# Altium PCB LPEDT_revA1_bikeit_rev_01.PcbDoc (part 1 of 3)
Units mil, origin at the board's own origin, x right, y up, seen from the top; angles counter-clockwise.
Board outline 6000 x 4000 mil, 2 copper layers (Top Layer, Bottom Layer); 80 components, 64 nets, 444 pads, 0 vias.
Unrouted connection lines stored in the file: 203.
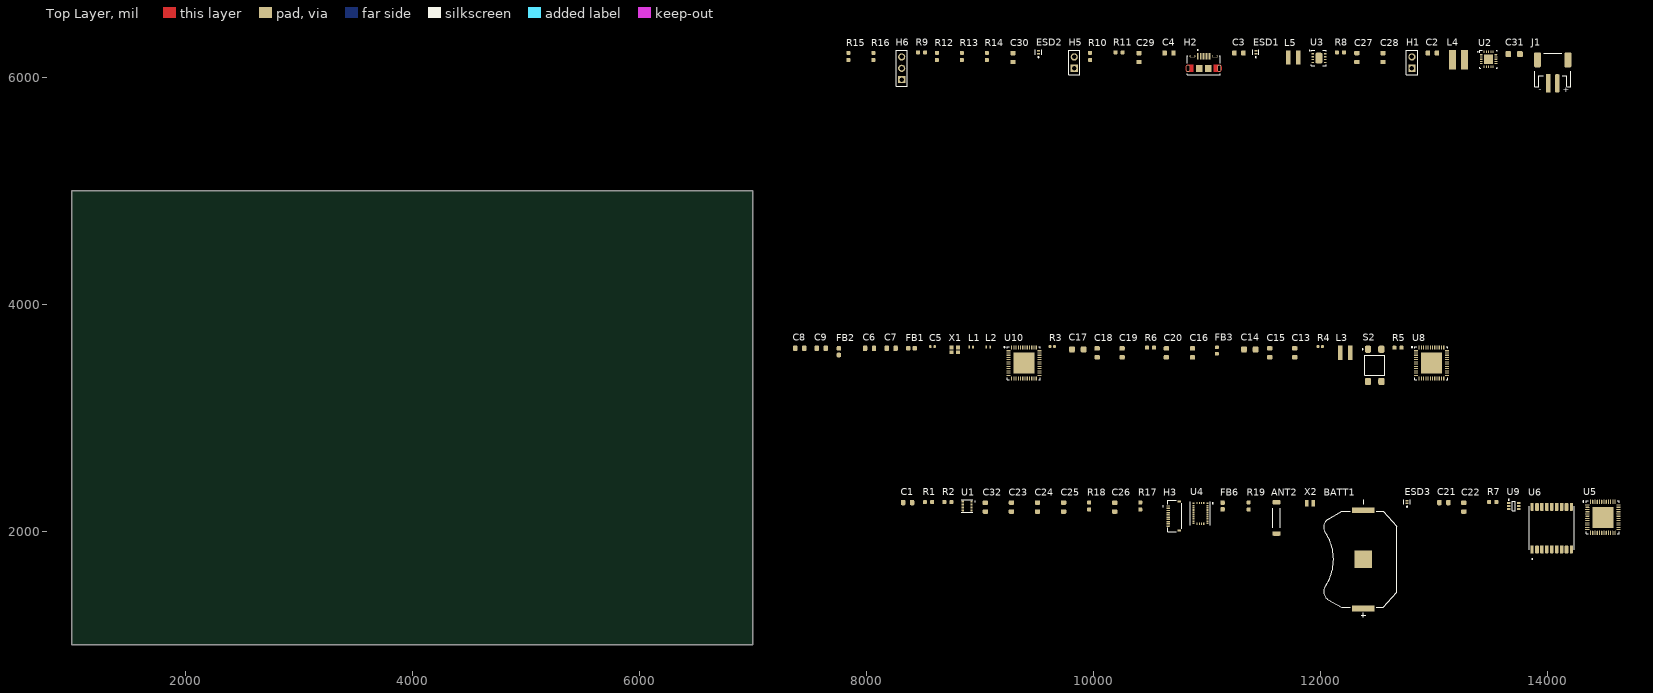
[diagram p0: Top Layer view]
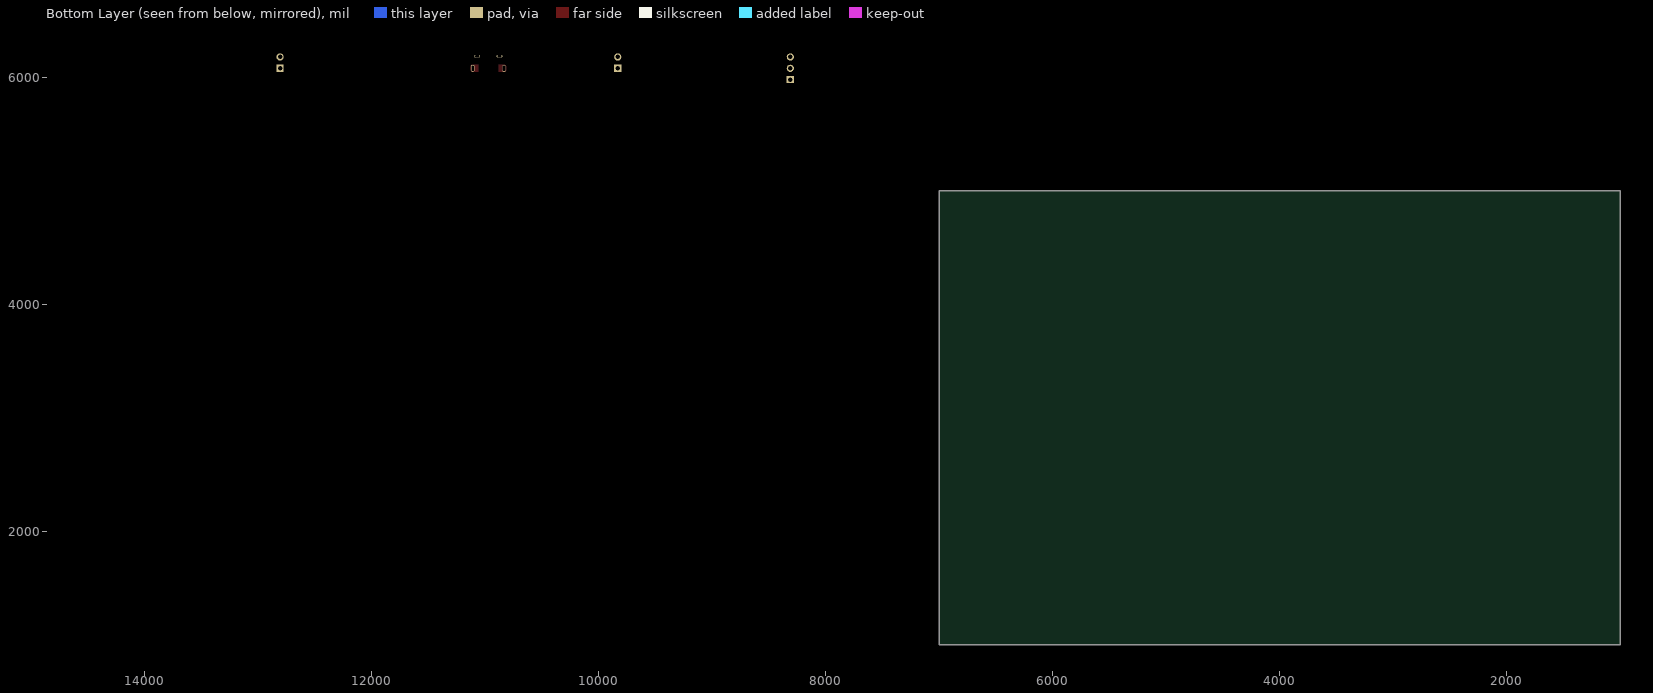
[diagram p1: Bottom Layer view, seen from below]

## Layer stack, top to bottom
Top Solder: solder mask 0.4, Solder Resist, Dk 3.5
Top Layer: signal copper 1.4
Dielectric 1: dielectric 12.6, FR-4, Dk 4.8
Bottom Layer: signal copper 1.4
Bottom Solder: solder mask 0.4, Solder Resist, Dk 3.5

## Board outline
1000,1000 7000,1000 7000,5000 1000,5000

## Design rules (kind name [scope] priority, off if disabled: settings)
Clearance [All] p1: gap=10 ignorepadtopadclearanceinfootprint=FALSE except(0: Arc-Hole Track-Hole SMDPad-Hole THPad-Hole Via-Hole Fill-Hole Poly-Hole Region-Hole Text-Hole)
PolygonConnect [All] p1: connectstyle=Relief reliefconductorwidth=10 reliefentries=4 polygonreliefangle="90 Angle" airgapwidth=10
RoomDefinition LPEDT_revA1_bikeit_POWER [InComponentClass('LPEDT_revA1_bikeit_POWER')] p1: confinementstyle=ConfineIn formatcopy=TRUE lockcomponents=FALSE outline 7808.31,5840 14253.31,5840 14253.31,6355 7808.31,6355
RoomDefinition LPEDT_revA1_bikeit_MCU_POWER_RESET [InComponentClass('LPEDT_revA1_bikeit_MCU_POWER_RESET')] p2: confinementstyle=ConfineIn formatcopy=TRUE lockcomponents=FALSE outline 7340,3273.54 13150,3273.54 13150,3753.54 7340,3753.54
RoomDefinition LPEDT_revA1_bikeit_MCU_IO [InComponentClass('LPEDT_revA1_bikeit_MCU_IO')] p3: confinementstyle=ConfineIn formatcopy=TRUE lockcomponents=FALSE outline 8290,1229.37 14660,1229.37 14660,2394.37 8290,2394.37
RoutingVias [All] p1: holewidth=28 width=50 viastyle="Through Hole" minholewidth=28 minwidth=50 maxholewidth=28 maxwidth=50
SolderMaskExpansion [All] p1: expansion=4 istentingtop=FALSE
Width [All] p1: maxlimit=10 minlimit=10 preferedwidth=10
30 further rules are at their usual default settings.

## Classes and differential pairs
component class LPEDT_revA1_bikeit_POWER: C2 C3 C4 C27 C28 C29 C30 C31 ESD1 ESD2 H1 H2 H5 H6 J1 L4 L5 R8 R9 R10 R11 R12 R13 R14 R15 R16 U2 U3
component class LPEDT_revA1_bikeit_MCU_POWER_RESET: ANT1 C5 C6 C7 C8 C9 C13 C14 C15 C16 C17 C18 C19 C20 FB1 FB2 FB3 L1 L2 L3 R3 R4 R5 R6 S2 U8 U10 X1
component class LPEDT_revA1_bikeit_MCU_IO: ANT2 BATT1 C1 C21 C22 C23 C24 C25 C26 C32 ESD3 FB6 H3 H4 R1 R2 R7 R17 R18 R19 U1 U4 U5 U6 U9 X2

## Components (designator, comment, footprint, x,y, rotation, side; value= is the part's Value field where it differs from the comment)
ANT2 "1.561GHZ/1.575GHZ CHIP" CHIP_ANTENNA 11615,2119.37 r90 top
BATT1 "2032 Coin Cell Holder" COINCELL-3034TR-MFG 12380,1754.37 r90 top
C1 "0.1uF 25V" CAP_0603_1.60mm*0.80mm 8365,2254.37 r0 top
C2 "4.7uF 25V" CAP_0603_1.60mm*0.80mm 12988.31,6215 r0 top
C3 "0.1uF 25V" CAP_0603_1.60mm*0.80mm 11283.31,6215 r0 top
C4 "0.1uF 25V" CAP_0603_1.60mm*0.80mm 10668.31,6215 r0 top
C5 "1.5pF 50V" CAP_0403_1.00mm*0.50mm 8585,3628.54 r0 top
C6 "100pF 100V" CAP_0603_1.60mm*0.80mm 8030,3613.54 r0 top
C7 "10pF 50V" CAP_0603_1.60mm*0.80mm 8220,3613.54 r0 top
C8 "0.22uF 25V" CAP_0603_1.60mm*0.80mm 7415,3613.54 r0 top
C9 "10pF 50V" CAP_0603_1.60mm*0.80mm 7605,3613.54 r0 top
C13 "4.7uF 25V" CAP_0603_1.60mm*0.80mm 11775,3573.54 r90 top
C14 "10uF 25V" CAP_0805_2MM 11380,3603.54 r0 top
C15 "1uF 50V" CAP_0603_1.60mm*0.80mm 11555,3573.54 r90 top
C16 "0.1uF 25V" CAP_0603_1.60mm*0.80mm 10875,3573.54 r90 top
C17 "10uF 25V" CAP_0805_2MM 9865,3603.54 r0 top
C18 "0.01uF 100V" CAP_0603_1.60mm*0.80mm 10035,3573.54 r90 top
C19 "1uF 50V" CAP_0603_1.60mm*0.80mm 10255,3573.54 r90 top
C20 "1uF 50V" CAP_0603_1.60mm*0.80mm 10645,3573.54 r90 top
C21 "1uF 50V" CAP_0603_1.60mm*0.80mm 13090,2254.37 r0 top
C22 "4.7uF 25V" CAP_0603_1.60mm*0.80mm 13265,2214.37 r90 top
C23 "0.1uF 25V" CAP_0603_1.60mm*0.80mm 9280,2214.37 r90 top
C24 "1uF 50V" CAP_0603_1.60mm*0.80mm 9510,2214.37 r90 top
C25 "1uF 50V" CAP_0603_1.60mm*0.80mm 9740,2214.37 r90 top
C26 "0.1uF 25V" CAP_0603_1.60mm*0.80mm 10190,2214.37 r90 top
C27 "0.01uF 100V" CAP_0603_1.60mm*0.80mm 12323.31,6175 r90 top
C28 "4.7uF 25V" CAP_0603_1.60mm*0.80mm 12553.31,6175 r90 top
C29 "22uF 10V" CAP_0603_1.60mm*0.80mm 10403.31,6175 r90 top
C30 "0.01uF 100V" CAP_0603_1.60mm*0.80mm 9293.31,6175 r90 top
C31 "100uF 6.3V" CAP_0805_2MM 13708.31,6205 r0 top
C32 "1uF 50V" CAP_0603_1.60mm*0.80mm 9050,2214.37 r90 top
ESD1 "ESD Diode" SP1003-01ETG-MFG 11433.31,6220 r90 top
ESD2 "ESD Diode" SP1003-01ETG-MFG 9518.31,6220 r90 top
ESD3 "ESD Diode" SP1003-01ETG-MFG 12765,2259.37 r90 top
FB1 "BLM18AG601SN1D 100 MHz" FB_Chip2PinSM127P600-8N 8400,3613.54 r0 top
FB2 "BLM18AG601SN1D 100 MHz" FB_Chip2PinSM127P600-8N 7760,3583.54 r90 top
FB3 "74279266 1 KOhm" FB_0603_1.60mm*0.80mm 11090,3593.54 r90 top
FB6 "BLM18AG601SN1D 100MHz" FB_Chip2PinSM127P600-8N 11140,2224.37 r90 top
H1 "Terminal Block - 2 Pin" 2-PIN_MALE_HEADER_01-IN 12808.31,6130 r90 top
H2 "USB MICRO B RECPT" MICROUSB_AMPHENOL_10118194-0001LF 10973.31,6080 r0 top
H3 "CONN FFC FPC 10POS 0.50MM" FPC_AYF531035A 10660,2224.37 r90 top
H5 "0.1\" M Header" 2-PIN_MALE_HEADER_01-IN 9833.31,6130 r90 top
H6 "0.1\" M Header" 3-PIN_MALE_HEADER_01-IN 8313.31,6080 r90 top
J1 "S2B-PH-SM4-TB" JST_S2B-PH-SM4-TB 14048.31,6095 r0 top
L1 "1.9nH 1A" IND_0402 8925,3623.54 r0 top
L2 "1.9nH 1A" IND_0402 9075,3623.54 r0 top
L3 "4.7uH 1.35A" "IND_WE-TPC 2828" 12220,3573.54 r0 top
L4 "22uH 510mA" IND_WE-TPC-3816-S 13218.31,6155 r0 top
L5 "10uH 650mA" IND_WE-TPC-2813-TH 11763.31,6175 r0 top
R1 "4.7k 1%" RES_0603_1608X06 8550,2259.37 r0 top
R2 "4.7k 1%" RES_0603_1608X06 8720,2259.37 r0 top
R3 "0 Ohm 1/16W" RES_C1005X04N 9640,3628.54 r0 top
R4 "0 Ohm 1/16W" RES_C1005X04N 12000,3628.54 r0 top
R5 "100 1%" RES_0603_1608X06 12685,3618.54 r0 top
R6 "1 Ohm 1% 0.1W" RES_0603_1608X06 10505,3618.54 r0 top
R7 "100k 1%" RES_0603_1608X06 13520,2259.37 r0 top
R8 "10k 1%" RES_0603_1608X06 12178.31,6220 r0 top
R9 "698 0.1W 1%" RES_0603_1608X06 8488.31,6220 r0 top
R10 "4.75M 1%" RES_0603_1608X06 9973.31,6185 r90 top
R11 "8.25M 0.1W 1%" RES_0603_1608X06 10228.31,6220 r0 top
R12 "4.22M 0.1W 1%" RES_0603_1608X06 8623.31,6185 r90 top
R13 "8.06M 1%" RES_0603_1608X06 8843.31,6185 r90 top
R14 "715k 1%" RES_0603_1608X06 9063.31,6185 r90 top
R15 "7.5M 0.1W 1%" RES_0603_1608X06 7843.31,6185 r90 top
R16 "5.62M 0.1W 1%" RES_0603_1608X06 8063.31,6185 r90 top
R17 "10k 1%" RES_0603_1608X06 10415,2224.37 r90 top
R18 "10k 1%" RES_0603_1608X06 9965,2224.37 r90 top
R19 "10k 1%" RES_0603_1608X06 11370,2224.37 r90 top
S2 "SWITCH SPST-NO 50MA 12V" SW_TL3305AF260QG 12480,3463.54 r0 top
U1 "BME280" BME280_PSON65P250X250X100-8N 8890,2224.37 r0 top
U2 "BQ25570RGRR PMIC" PMIC_RGR0020A_NV 13483.31,6160 r0 top value=Value
U3 "TPS2115ADRBT Power Mux" PMUX_SON127P600-8N 11988.31,6170 r0 top
U4 "BNO055" BNO055-MFG 10945,2159.37 r0 top
U5 "EFR32BG13P732F512GM48-C" MCU_QFN50P700X700X90_HS-49N 14490,2124.37 r0 top
U6 "MAX-M8Q-0" XCVR_MAX-M8C-0-10 14040,2029.37 r90 top
U8 "EFR32BG13P732F512GM48-C" MCU_QFN50P700X700X90_HS-49N 12980,3483.54 r0 top
U9 "TPS22919DCKR Power Switch/Driver" LS_SOT65P210X110-6N 13705,2224.37 r0 top
U10 "EFR32BG13P732F512GM48-C" MCU_QFN50P700X700X90_HS-49N 9390,3483.54 r0 top
X1 "38.4 MHz Crystal" "SMD_4 CRYSTAL" 8780,3598.54 r0 top
X2 "32.768kHz Crystal" "SMD_2 Crystal" 11910,2249.37 r0 top

## Footprints (in the part's own frame and the unit in brackets; to place one, negate y for a bottom-side part, rotate by r counter-clockwise, add the part's x,y. Pads: shape width x height; smd on the part's side, far side on the other; paste and mask are expansions set on the pad)
2-PIN_MALE_HEADER_01-IN [mm] "Terminal Assembly, 1x2 Pins, Vertical, 2.54mm Pitch, Male"
  rect 1.6x1.6 hole 1.02: 1(-1.27,0)
  round 1.6 hole 1.02: 2(1.27,0)
  silkscreen extent -2.73,-1.24 2.73,1.24, body extent -2.54,-1.22 2.54,1.27, height 8.54
3-PIN_MALE_HEADER_01-IN [mm] ".025 SQ Post Terminal Strip Assembly, 1x3 Pins, Vertical, 2.54mm Pitch, Male"
  rect 1.6x1.6 hole 1.02: 1(-2.54,0)
  round 1.6 hole 1.02: 2(0,0) 3(2.54,0)
  silkscreen extent -4,-1.27 4,1.27, body extent -3.81,-1.27 3.81,1.22, height 8.54
BME280_PSON65P250X250X100-8N [mm]
  rect 0.49x0.45 smd paste+0 mask+0.085: 1(0.97,0.975)
  rrect25% 0.49x0.45 smd paste+0 mask+0.085: 2(0.97,0.325) 3(0.97,-0.325) 4(0.97,-0.975) 5(-0.97,-0.975) 6(-0.97,-0.325) 7(-0.97,0.325) 8(-0.97,0.975)
  silkscreen extent -1.3,-1.39 1.83,1.39, body extent -1.25,-1.25 1.25,1.25, height 1
BNO055-MFG [mm]
  rect 0.475x0.35 smd paste+0 mask-1000: 1(1.563,2.25) 6(-1.562,2.25) 7(-1.562,1.75) 8(-1.562,1.25) 9(-1.562,0.75) 10(-1.562,0.25) 11(-1.562,-0.25) 12(-1.562,-0.75) 13(-1.562,-1.25) 14(-1.562,-1.75) 15(-1.562,-2.25) 20(1.563,-2.25) 21(1.563,-1.75) 22(1.563,-1.25) 23(1.563,-0.75) 24(1.563,-0.25) 25(1.563,0.25) 26(1.563,0.75) 27(1.563,1.25) 28(1.563,1.75)
  rect 0.25x0.475 smd paste+0 mask-1000: 2(0.75,2.313) 3(0.25,2.313) 4(-0.25,2.313) 5(-0.75,2.313) 16(-0.75,-2.312) 17(-0.25,-2.312) 18(0.25,-2.312) 19(0.75,-2.312)
  silkscreen extent -2.25,-2.65 2.88,2.65, body extent -2.45,-3.15 2.45,3.15, height 0.25
CAP_0403_1.00mm*0.50mm [mm] "Chip Capacitor, 2-Leads, Body 1.00x0.50mm, IPC Medium Density"
  rrect50% 0.55x0.6 smd: 1(-0.475,0) 2(0.475,0)
  body extent -0.53,-0.28 0.53,0.28, height 0.55
CAP_0603_1.60mm*0.80mm [mm] "Chip Capacitor, 2-Leads, Body 1.60x0.80mm, IPC Medium Density"
  rrect50% 1x1.2 smd: 1(-1,0) 2(1,0)
  body extent -0.87,-0.48 0.88,0.47, height 0.95
CAP_0805_2MM [mm] "Chip Capacitor, 2-Leads, Body 2.00x1.25mm, IPC Medium Density"
  rrect50% 1.3x1.4 smd: 1(-1.3,0) 2(1.3,0)
  body extent -1.07,-0.7 1.08,0.7, height 1.4
CHIP_ANTENNA [mm] "Chip Capacitor, 2-Leads, Body 7.00x2.00mm, IPC Medium Density"
  rrect50% 1x1.8 smd: 1(-3.5,0) 2(3.5,0)
  silkscreen extent -2.2,-0.8 2.2,0.8, body extent -3.6,-1.1 3.6,1.1, height 1
COINCELL-3034TR-MFG [mil]
  rect 156x156 smd paste-39370.1 mask+0: 1(0,0)
  rect 50x200 smd paste+0 mask+0: 2(-432.48,0) 2(432.48,0)
  silkscreen extent -512,-296 526,349, body extent -461,-300 461,353, height 10
FB_0603_1.60mm*0.80mm [mm] "Ferrite Bead, 2-Leads, Body 1.60x0.80mm, IPC Medium Density"
  rrect50% 0.8x0.85 smd: 1(-0.725,0) 2(0.725,0)
  body extent -0.8,-0.4 0.8,0.4, height 0.8
FB_Chip2PinSM127P600-8N [mm]
  rrect50% 1.02x0.98 smd: 1(-0.74,0) 2(0.74,0)
  body extent -0.87,-0.48 0.88,0.47, height 0.95
FPC_AYF531035A [mm]
  rect 0.3x0.8 smd mask+0.082: 1(0,0)
  rrect50% 0.3x0.8 smd mask+0.082: 2(-0.5,0) 3(-1,0) 4(-1.5,0) 5(-2,0) 6(-2.5,0) 7(-3,0) 8(-3.5,0) 9(-4,0) 10(-4.5,0)
  rrect50% 0.4x0.8 smd mask+0.082: S1(1,-2.5) S2(-5.5,-2.5)
  silkscreen extent -5.75,-3.1 1.25,1.22, body extent -5.75,-2.97 1.25,0.73, height 1
IND_0402 [mm] "Chip Inductor, 2-Leads, Body 1.00x0.60mm, IPC Medium Density"
  rrect50% 0.35x0.65 smd: 1(-0.425,0) 2(0.425,0)
  body extent -0.52,-0.33 0.53,0.33, height 0.6
"IND_WE-TPC 2828" [mm] "SMD Inductor, 2-Leads, Body 2,8x2,8mm"
  rect 1x3.2 smd: 1(-1.1,0) 2(1.1,0)
  body extent -1.4,-1.4 1.4,1.4, height 2.79
IND_WE-TPC-2813-TH [mm] "SMD Inductor, 2-Leads, Body 2.8 x 2.8 mm"
  rect 1x3.2 smd: 1(-1.1,0) 2(1.1,0)
  body extent -1.38,-1.39 1.4,1.39, height 1.15
IND_WE-TPC-3816-S [mm] "SMD Inductor, 2-Leads, Body 3.8 x 3.8 mm"
  rect 1.6x4.3 smd: 1(-1.35,0) 2(1.35,0)
  body extent -1.9,-1.9 1.9,1.9, height 1.64
JST_S2B-PH-SM4-TB [mil]
  rect 40x160 smd: 1(-39.44,-147.2)
  rrect50% 40x160 smd: 2(39.93,-147.2)
  rrect50% 63x134 smd: NC1(-133.93,58.46) NC2(133.93,58.46)
  silkscreen extent -158,-179 158,117, body extent -156,-216 155,123, height 220
LS_SOT65P210X110-6N [mm] "SOT23, 6-Leads, Body 2.00x2.10mm, Pitch 0.65mm, IPC Medium Density"
  rrect50% 0.85x0.4 smd: 1(-1.125,0.65) 2(-1.125,0) 3(-1.125,-0.65) 4(1.125,-0.65) 5(1.125,0) 6(1.125,0.65)
  silkscreen extent -1.25,-1.1 0.3,1.52, body extent -1.2,-1.07 1.2,1.07, height 1.1
MCU_QFN50P700X700X90_HS-49N [mm] "QFN, 48-Leads, Body 7.00x7.00mm, Pitch 0.50mm, Thermal Pad 4.70x4.70mm, IPC Medium Density"
  rect 4.7x4.7 smd: 0(0,0)
  rect 0.95x0.25 smd: 1(-3.475,2.75)
  oval 0.95x0.25 smd: 2(-3.475,2.25) 3(-3.475,1.75) 4(-3.475,1.25) 5(-3.475,0.75) 6(-3.475,0.25) 7(-3.475,-0.25) 8(-3.475,-0.75) 9(-3.475,-1.25) 10(-3.475,-1.75) 11(-3.475,-2.25) 12(-3.475,-2.75) 25(3.475,-2.75) 26(3.475,-2.25) 27(3.475,-1.75) 28(3.475,-1.25) 29(3.475,-0.75) 30(3.475,-0.25) 31(3.475,0.25) 32(3.475,0.75) 33(3.475,1.25) 34(3.475,1.75) 35(3.475,2.25) 36(3.475,2.75)
  oval 0.25x0.95 smd: 13(-2.75,-3.475) 14(-2.25,-3.475) 15(-1.75,-3.475) 16(-1.25,-3.475) 17(-0.75,-3.475) 18(-0.25,-3.475) 19(0.25,-3.475) 20(0.75,-3.475) 21(1.25,-3.475) 22(1.75,-3.475) 23(2.25,-3.475) 24(2.75,-3.475) 37(2.75,3.475) 38(2.25,3.475) 39(1.75,3.475) 40(1.25,3.475) 41(0.75,3.475) 42(0.25,3.475) 43(-0.25,3.475) 44(-0.75,3.475) 45(-1.25,3.475) 46(-1.75,3.475) 47(-2.25,3.475) 48(-2.75,3.475)
  silkscreen extent -4.47,-3.7 3.7,3.7, body extent -3.6,-3.6 3.6,3.6, height 0.9
MICROUSB_AMPHENOL_10118194-0001LF [mm]
  rect 0.4x1.35 smd: 1(-1.3,2.7) 2(-0.65,2.7) 3(0,2.7) 4(0.65,2.7) 5(1.3,2.7)
  oval 1.3x0.65 hole 0.55 slot 0.85 at 0 deg: S1(-2.5,2.7) S2(2.5,2.7)
  oval 0.775x1.55 hole 0.5 slot 1.15 at 90 deg: S3(-3.5,0) S6(3.5,0)
  rect 1.5x1.55 smd: S4(-1,0) S5(1,0)
  Top Layer region: 193 vertices and 0 holes, not listed, extent 2.3,-0.78 4,0.775
  Top Layer region: 193 vertices and 0 holes, not listed, extent -4,-0.775 -2.3,0.78
  silkscreen extent -3.7,-1.45 3.7,4.2, body extent -4.05,-2.69 4,2.89, height 2.75
PMIC_RGR0020A_NV [mm]
  rect 0.6x0.24 smd paste-0.102 mask+0.051: 1(-1.65,1)
  rrect50% 0.6x0.24 smd paste-0.102 mask+0.051: 2(-1.65,0.5) 3(-1.65,0) 4(-1.65,-0.5) 5(-1.65,-1) 11(1.65,-1) 12(1.65,-0.5) 13(1.65,0) 14(1.65,0.5) 15(1.65,1)
  rrect50% 0.24x0.6 smd paste-0.102 mask+0.051: 6(-1,-1.65) 7(-0.5,-1.65) 8(0,-1.65) 9(0.5,-1.65) 10(1,-1.65) 16(1,1.65) 17(0.5,1.65) 18(0,1.65) 19(-0.5,1.65) 20(-1,1.65)
  rect 2.05x2.05 smd paste-1.025 mask+0.051: 21(0,0)
  rrect50% 0.6x0.24 on Top Paste paste-0.102 mask+0.051: ""(-1.65,-1.001) ""(-1.65,-0.501) ""(-1.65,-0.001) ""(-1.65,0.499) ""(1.65,-1.001) ""(1.65,-0.501) ""(1.65,-0.001) ""(1.65,0.499) ""(1.65,0.999)
  rect 0.6x0.24 on Top Paste paste-0.102 mask+0.051: ""(-1.65,0.999)
  rrect50% 0.24x0.6 on Top Paste paste-0.102 mask+0.051: ""(-1,-1.651) ""(-1,1.649) ""(-0.5,-1.651) ""(-0.5,1.649) ""(0,-1.651) ""(0,1.649) ""(0.5,-1.651) ""(0.5,1.649) ""(1,-1.651) ""(1,1.649)
  silkscreen extent -2.46,-1.97 1.97,1.97, body extent -1.75,-1.75 1.75,1.75, height 1
PMUX_SON127P600-8N [mm]
  rect 0.6x0.3 smd: 1(-1.4,0.975)
  rrect50% 0.6x0.3 smd: 2(-1.4,0.325) 3(-1.4,-0.325) 4(-1.4,-0.975) 5(1.4,-0.975) 6(1.4,-0.325) 7(1.4,0.325) 8(1.4,0.975)
  rrect50% 1.6x2.4 smd: 9(0,0)
  silkscreen extent -2.15,-1.7 1.7,1.75, body extent -1.6,-1.55 1.6,1.55, height 1
RES_0603_1608X06 [mm] "Chip Resistor, 2-Leads, Body 1.60x0.80mm, IPC Medium Density"
  rrect50% 0.9x0.9 smd: 1(-0.8,0) 2(0.8,0)
  body extent -0.78,-0.43 0.77,0.42, height 0.45
RES_C1005X04N [mm] "Chip Resistor, 2-Leads, Body 1.00x0.50mm, IPC Medium Density"
  rrect50% 0.6x0.6 smd: 1(-0.5,0) 2(0.5,0)
  body extent -0.55,-0.3 0.55,0.3, height 0.4
"SMD_2 Crystal" [mm]
  rect 0.8x1.5 smd: 1(-0.751,0) 2(0.751,0)
  body extent -1,-0.6 1,0.6, height 0.6
"SMD_4 CRYSTAL" [mm]
  rect 0.9x0.8 smd: 1(-0.7,-0.55) 2(0.7,-0.55) 3(0.7,0.55) 4(-0.7,0.55)
  body extent -1,-0.8 1,0.8, height 0.45
SP1003-01ETG-MFG [mm]
  rect 0.325x0.65 smd paste+0 mask+0: 1(-0.325,0) 2(0.325,0)
  silkscreen extent -1.17,-0.7 0.55,0.7, body extent -0.65,-0.45 0.65,0.45, height 0.25
SW_TL3305AF260QG [mm]
  rrect50% 1.4x1.6 smd: 1(-1.5,3.6) 2(-1.5,-3.6) 3(1.5,3.6) 4(1.5,-3.6)
  silkscreen extent -2.8,-2.25 2.25,3.7, body extent -2.25,-3.75 2.25,3.75, height 3.7
XCVR_MAX-M8C-0-10 [mm]
  rect 1.8x0.7 smd paste-2 mask+0: 1(-4.75,4.4)
  rrect50% 1.8x0.8 smd paste-2 mask+0: 2(-4.75,3.3) 3(-4.75,2.2) 4(-4.75,1.1) 5(-4.75,0) 6(-4.75,-1.1) 7(-4.75,-2.2) 8(-4.75,-3.3) 11(4.75,-3.3) 12(4.75,-2.2) 13(4.75,-1.1) 14(4.75,0) 15(4.75,1.1) 16(4.75,2.2) 17(4.75,3.3)
  rrect50% 1.8x0.7 smd paste-2 mask+0: 9(-4.75,-4.4) 10(4.75,-4.4) 18(4.75,4.4)
  rrect50% 1.8x0.7 on Top Paste paste-2 mask+0: ""(-4.749,-4.399) ""(4.751,-4.399) ""(4.751,4.401)
  rrect50% 1.8x0.8 on Top Paste paste-2 mask+0: ""(-4.749,-3.299) ""(-4.749,-2.199) ""(-4.749,-1.099) ""(-4.749,0.001) ""(-4.749,1.101) ""(-4.749,2.201) ""(-4.749,3.301) ""(4.751,-3.299) ""(4.751,-2.199) ""(4.751,-1.099) ""(4.751,0.001) ""(4.751,1.101) ""(4.751,2.201) ""(4.751,3.301)
  rect 1.8x0.7 on Top Paste paste-2 mask+0: ""(-4.749,4.401)
  silkscreen extent -7,-5.06 4.85,5.06, body extent -4.85,-5.05 4.85,5.05, height 2.7

## Part data
ANT2: library part 1575AT43A0040E, "RF ANT 1.561GHZ/1.575GHZ CHIP", Case/Package=SMD/SMT, Frequency=1.575GHz, Manufacturer=Johanson, Max Operating Temperature=85°C, Max Power Dissipation=3W, Min Operating Temperature=-40°C, Package Quantity=1, Supplier Part Number 1=712-1003-1-ND, Bandwidth=40MHz, Category="RF Antennas", ComponentLink1Description=https://datasheet.ciiva.com/2792/jti-antenna-1575at43a40-2006-09-2792227.pdf?src-supplier=Digi-Key, ComponentLink1URL=https://datasheet.ciiva.com/2792/jti-antenna-1575at43a40-2006-09-2792227.pdf?src-supplier=Digi-Key, ComponentLink2Description=https://datasheet.ciiva.com/24048/antenna-1575at43a0040-258086-24048619.pdf?src-supplier=Mouser, ComponentLink2URL=https://datasheet.ciiva.com/24048/antenna-1575at43a0040-258086-24048619.pdf?src-supplier=Mouser, ComponentLink3Description=https://datasheet.ciiva.com/4172/antenna-1575at43a0040-4172807.pdf?src-supplier=Arrow+Electronics, ComponentLink3URL=https://datasheet.ciiva.com/4172/antenna-1575at43a0040-4172807.pdf?src-supplier=Arrow+Electronics, Gain=-2.5dB, Height=0.031inch, Impedance=50R, Lead Free="Lead Free", Length=7mm, Manufacturer Part Number=1575AT43A0040E, Mount="Surface Mount", Number of Bands=1, Number of Pins=2, Packaging="Tape and Reel", Power Rating=3W, Pricing 1="1=0.84000, 10=0.75200, 25=0.71400, 100=0.58650, 250=0.54824, 500=0.48450 (USD)", Return Loss=-9.5dB, RoHS=Yes, Stock 1=56, Supplier 1=Digi-Key, Termination=Solder, Width=2mm
BATT1: library part 3034TR, "Battery Holder 1-Cell 20mm Size Tin Nickel SMT Mount T/R", Case/Package=SMD/SMT, Manufacturer="Keystone Electronics", Package Quantity=500, Supplier Part Number 1=36-3034CT-ND, Category=Uncategorized, ComponentLink1Description=https://datasheet.ciiva.com/29204/3034tr-29204080.pdf?src-supplier=Digi-Key, ComponentLink1URL=https://datasheet.ciiva.com/29204/3034tr-29204080.pdf?src-supplier=Digi-Key, ComponentLink2Description=https://datasheet.ciiva.com/41797/3034-41797079.pdf?src-supplier=Digi-Key, ComponentLink2URL=https://datasheet.ciiva.com/41797/3034-41797079.pdf?src-supplier=Digi-Key, Contact Plating=Tin, Lead Free="Lead Free", Manufacturer Part Number=3034TR, Material=Bronze, Mount="Surface Mount,PCB", Number of Batteries=1, Number of Cells=1, Packaging="Tape and Reel", Pricing 1="1=0.42000, 25=0.37760, 100=0.28630, 250=0.25592 (USD)", RoHS=Yes, Stock 1=37668, Supplier 1=Digi-Key, Termination=SMD/SMT
C1 C3 C4 C16 C23 C26: library part GCJ188R71E104KA12D, "CAP CER 0.1UF 25V X7R 0603", Capacitance=100nF, Case Code (Imperial)=0603, Case Code (Metric)=1608, Manufacturer=Murata, Max Operating Temperature=125°C, Min Operating Temperature=-55°C, Ratings=AEC-Q200, Supplier Part Number 1=490-16477-1-ND, Tolerance=10%, Voltage Rating=25V, Case/Package=0603, Category="Ceramic Capacitors", ComponentLink1Description=http://search.murata.co.jp/Ceramy/image/img/A01X/G101/ENG/GCJ188R71E104KA12-01.pdf?src-supplier=Digi-Key, ComponentLink1URL=http://search.murata.co.jp/Ceramy/image/img/A01X/G101/ENG/GCJ188R71E104KA12-01.pdf?src-supplier=Digi-Key, Features="Soft Termination", Manufacturer Part Number=GCJ188R71E104KA12D, Mount="Surface Mount", Packaging="Tape and Reel", Pricing 1="1=0.21000, 10=0.14900, 50=0.08480, 100=0.07030, 500=0.04928, 1000=0.04080 (USD)", RoHS=Yes, RoHS Compliant=Yes, Stock 1=1672, Supplier 1=Digi-Key
C2 C13 C22 C28: library part GRM188R61E475KE11D, "Cap Ceramic 0603 4.7 uF 25 V ±10 % Tolerance X5R SMT Multilayer Ceramic Capacitor", Capacitance=4.7uF, Case Code (Imperial)=0603, Case Code (Metric)=1608, Dielectric=X5R, Manufacturer=Murata, Max Operating Temperature=85°C, Min Operating Temperature=-55°C, Package Quantity=4000, Supplier Part Number 1=490-7203-1-ND, Tolerance=10%, Voltage=25V, Case/Package=0603, Category="Ceramic Capacitors", ComponentLink1Description=https://datasheet.ciiva.com/46444/1769893-46444982.pdf?src-supplier=Element14, ComponentLink1URL=https://datasheet.ciiva.com/46444/1769893-46444982.pdf?src-supplier=Element14, ComponentLink2Description=https://datasheet.ciiva.com/46444/1769893-46444983.pdf?src-supplier=Element14, ComponentLink2URL=https://datasheet.ciiva.com/46444/1769893-46444983.pdf?src-supplier=Element14, ComponentLink3Description=https://datasheet.ciiva.com/14891/partnumbering-e-01-14891103.pdf?src-supplier=Digi-Key, ComponentLink3URL=https://datasheet.ciiva.com/14891/partnumbering-e-01-14891103.pdf?src-supplier=Digi-Key, ComponentLink4Description=https://datasheet.ciiva.com/14891/partnumbering-e-01-14891102.pdf?src-supplier=Digi-Key, ComponentLink4URL=https://datasheet.ciiva.com/14891/partnumbering-e-01-14891102.pdf?src-supplier=Digi-Key, Depth=0.8mm, Height=0.8mm, Lead Free="Lead Free", Length=1.6mm, Manufacturer Part Number=GRM188R61E475KE11D, Material=Ceramic, Mount="Surface Mount", Packaging="Cut Tape", Pricing 1="1=0.36000, 10=0.24700, 50=0.17280, 100=0.14820, 500=0.11112, 1000=0.09384 (USD)", REACH SVHC="No SVHC", RoHS=Yes, RoHS Compliant=Yes, Series=GRM, Stock 1=307528, Supplier 1=Digi-Key, Thickness=0.031inch, Voltage Rating=25V, Voltage Rating (DC)=25V, Width=0.031inch
C5: library part 500R07S1R5BV4T, "1.5pF ±0.1pF 50V Ceramic Capacitor C0G, NP0 0402 (1005 Metric)", Manufacturer="Johanson Technology Inc.", Supplier Part Number 1=712-1270-1-ND, Manufacturer Part Number=500R07S1R5BV4T, RoHS Compliant=Yes, Supplier 1=Digi-Key
C6: library part GRM1885C2A101FA01D, "Multilayer Ceramic Capacitors MLCC - SMD/SMT 100pF 100Volts C0G 0.01", Capacitance=100pF, Case Code (Imperial)=0603, Case Code (Metric)=1608, Dielectric=C0G, Manufacturer=Murata, Max Operating Temperature=125°C, Min Operating Temperature=-55°C, Package Quantity=4000, Supplier Part Number 1=490-14623-1-ND, Tolerance=1%, Voltage Rating=100V, Case/Package=0603, Category="Ceramic Capacitors", ComponentLink1Description=https://datasheet.ciiva.com/29537/partnumbering-e-01-29537864.pdf?src-supplier=Digi-Key, ComponentLink1URL=https://datasheet.ciiva.com/29537/partnumbering-e-01-29537864.pdf?src-supplier=Digi-Key, Depth=0.8mm, Height=0.8mm, Length=1.6mm, Manufacturer Part Number=GRM1885C2A101FA01D, Mount="Surface Mount", Packaging="Tape and Reel", Pricing 1="4000=0.03696, 8000=0.03511, 12000=0.03326, 28000=0.03142 (USD)", Radiation Hardening=No, RoHS=Yes, Stock 1=40000, Supplier 1=Digi-Key, Thickness=0.035inch, Voltage Rating (DC)=100V, Width=0.031inch
C7 C9: library part GRM1885C1H100FA01D, "Cap Ceramic 10pF 50V C0G 1% SMD 0603 125C T/R", Capacitance=10pF, Case Code (Imperial)=0603, Case Code (Metric)=1608, Dielectric=C0G, Manufacturer=Murata, Max Operating Temperature=125°C, Min Operating Temperature=-55°C, Package Quantity=4000, Supplier Part Number 1=490-9713-1-ND, Temperature Coefficient=30ppm/°C, Tolerance=1%, Voltage=50V, Case/Package=0603, Category="Ceramic Capacitors", ComponentLink1Description=https://datasheet.ciiva.com/2989/c02e-2989424.pdf?src-supplier=Avnet, ComponentLink1URL=https://datasheet.ciiva.com/2989/c02e-2989424.pdf?src-supplier=Avnet, ComponentLink2Description=https://datasheet.ciiva.com/166/partnumbering-e-01-166098.pdf?src-supplier=Digi-Key, ComponentLink2URL=https://datasheet.ciiva.com/166/partnumbering-e-01-166098.pdf?src-supplier=Digi-Key, ComponentLink3Description=https://datasheet.ciiva.com/45259/partnumbering-e-01-45259517.pdf?src-supplier=Digi-Key, ComponentLink3URL=https://datasheet.ciiva.com/45259/partnumbering-e-01-45259517.pdf?src-supplier=Digi-Key, ComponentLink4Description=https://datasheet.ciiva.com/17453/c02e-17453134.pdf?src-supplier=Avnet+Europe, ComponentLink4URL=https://datasheet.ciiva.com/17453/c02e-17453134.pdf?src-supplier=Avnet+Europe, Construction=Flat, Depth=0.8mm, Height=0.8mm, Lead Free="Lead Free", Length=1.6mm, Manufacturer Part Number=GRM1885C1H100FA01D, Material=Ceramic, Mount="Surface Mount", Packaging="Tape and Reel", Pricing 1="1=0.15000, 10=0.11000, 50=0.06240, 100=0.05170 (USD)", Radiation Hardening=No, RoHS=Yes, RoHS Compliant=Yes, Series=GRM, Stock 1=160, Supplier 1=Digi-Key, Termination=SMD/SMT, Thickness=0.035inch, Voltage Rating=50V, Voltage Rating (DC)=50V, Width=0.8mm
C8: library part GRM188R71E224KA88D, "Capacitor 220 nF 25 VDC PU=4000 ST, GRM188R71E224KA88D, Murata", Capacitance=220nF, Case Code (Imperial)=0603, Case Code (Metric)=1608, Dielectric=X7R, Manufacturer=Murata, Max Operating Temperature=125°C, Min Operating Temperature=-55°C, Package Quantity=1, Supplier Part Number 1=490-3290-1-ND, Tolerance=10%, Voltage=50V, Voltage Rating=25V, Case/Package=0603, Category="Ceramic Capacitors", ComponentLink1Description=https://datasheet.ciiva.com/5411/product-5411362.pdf?src-supplier=Mouser, ComponentLink1URL=https://datasheet.ciiva.com/5411/product-5411362.pdf?src-supplier=Mouser, ComponentLink2Description=https://datasheet.ciiva.com/11786/0900766b807a1cab-11786308.pdf?src-supplier=RSComponents, ComponentLink2URL=https://datasheet.ciiva.com/11786/0900766b807a1cab-11786308.pdf?src-supplier=RSComponents, ComponentLink3Description=https://datasheet.ciiva.com/6068/1784408-6068393.pdf?src-supplier=Farnell, ComponentLink3URL=https://datasheet.ciiva.com/6068/1784408-6068393.pdf?src-supplier=Farnell, ComponentLink4Description=https://datasheet.ciiva.com/133/grm188r71e224ka88-01-133883.pdf?src-supplier=Digi-Key, ComponentLink4URL=https://datasheet.ciiva.com/133/grm188r71e224ka88-01-133883.pdf?src-supplier=Digi-Key, ComponentLink5Description=https://datasheet.ciiva.com/133/grm188r71e224ka88-01-133884.pdf?src-supplier=Digi-Key, ComponentLink5URL=https://datasheet.ciiva.com/133/grm188r71e224ka88-01-133884.pdf?src-supplier=Digi-Key, ComponentLink6Description=https://datasheet.ciiva.com/3777/1531grm188r71e224ka8823-3777688.pdf?src-supplier=Arrow+Electronics, ComponentLink6URL=https://datasheet.ciiva.com/3777/1531grm188r71e224ka8823-3777688.pdf?src-supplier=Arrow+Electronics, ComponentLink7Description=https://datasheet.ciiva.com/29202/451619-da-01-en-vs-kondensator-0603-29202002.pdf?src-supplier=Conrad, ComponentLink7URL=https://datasheet.ciiva.com/29202/451619-da-01-en-vs-kondensator-0603-29202002.pdf?src-supplier=Conrad, ComponentLink8Description=https://datasheet.ciiva.com/14116/nmgrm-data-en-14116629.pdf?src-supplier=Distrelec, ComponentLink8URL=https://datasheet.ciiva.com/14116/nmgrm-data-en-14116629.pdf?src-supplier=Distrelec, ComponentLink9Description=https://datasheet.ciiva.com/16425/product-16425866.pdf?src-supplier=Future+Electronics, ComponentLink9URL=https://datasheet.ciiva.com/16425/product-16425866.pdf?src-supplier=Future+Electronics, ComponentLink10Description=https://datasheet.ciiva.com/22703/1784408-22703338.pdf?src-supplier=Element14, ComponentLink10URL=https://datasheet.ciiva.com/22703/1784408-22703338.pdf?src-supplier=Element14, ComponentLink11Description=https://datasheet.ciiva.com/7937/1784408-7937645.pdf?src-supplier=Element14, ComponentLink11URL=https://datasheet.ciiva.com/7937/1784408-7937645.pdf?src-supplier=Element14, ComponentLink12Description=https://datasheet.ciiva.com/48436/nmgrm-data-en-48436687.pdf?src-supplier=Distrelec, ComponentLink12URL=https://datasheet.ciiva.com/48436/nmgrm-data-en-48436687.pdf?src-supplier=Distrelec, Depth=0.8mm, Height=0.8mm, Lead Free="Lead Free", Length=1.6mm, Manufacturer Part Number=GRM188R71E224KA88D, Material=Ceramic, Mount="Surface Mount", Number of Pins=2, Packaging="Tape and Reel", Pricing 1="1=0.20000, 10=0.13700, 50=0.08240, 100=0.06960, 500=0.04760, 1000=0.04210 (USD)", Radiation Hardening=No, REACH SVHC="No SVHC", RoHS=Yes, RoHS Compliant=Yes, Stock 1=208118, Supplier 1=Digi-Key, Termination=SMD/SMT, Thickness=0.035inch, Voltage Rating (DC)=25V, Width=0.8mm
C14 C17: library part GRM21BR61E106KA73K, "CAP CER 10UF 25V X5R 0805", Capacitance=10uF, Case/Package=0805, Dielectric=X5R, Manufacturer=Murata, Max Operating Temperature=85°C, Min Operating Temperature=-55°C, Package Quantity=10000, Supplier Part Number 1=490-16824-1-ND, Tolerance=10%, Voltage Rating=25V, Category="Ceramic Capacitors", ComponentLink1Description=http://www.mouser.com/ds/2/281/c02e-2905.pdf?src-supplier=Mouser, ComponentLink1URL=http://www.mouser.com/ds/2/281/c02e-2905.pdf?src-supplier=Mouser, ComponentLink2Description=http://search.murata.co.jp/Ceramy/image/img/A01X/G101/ENG/GRM21BR61E106KA73-01.pdf?src-supplier=Digi-Key, ComponentLink2URL=http://search.murata.co.jp/Ceramy/image/img/A01X/G101/ENG/GRM21BR61E106KA73-01.pdf?src-supplier=Digi-Key, ComponentLink3Description=https://search.murata.co.jp/Ceramy/image/img/A01X/G101/ENG/GRM21BR61E106KA73-01.pdf?src-supplier=Digi-Key, ComponentLink3URL=https://search.murata.co.jp/Ceramy/image/img/A01X/G101/ENG/GRM21BR61E106KA73-01.pdf?src-supplier=Digi-Key, Length=0.079inch, Manufacturer Part Number=GRM21BR61E106KA73K, Mount="Surface Mount", Packaging="Tape and Reel", Pricing 1="1=0.23000, 10=0.15700, 50=0.09400, 100=0.07940, 500=0.05434, 1000=0.04807, 2500=0.04598, 5000=0.04180 (USD)", RoHS=Yes, RoHS Compliant=Yes, Stock 1=79269, Supplier 1=Digi-Key, Thickness=0.055inch, Voltage Rating (DC)=25V, Weight=0.000335oz, Width=0.049inch
C15 C19 C20 C21 C24 C25 C32: library part GRT188R61H105KE13D, "CAP, MLCC, AEC-Q200, X5R, 1uF, 50V, 0603", Capacitance=1uF, Case Code (Imperial)=0603, Case Code (Metric)=1608, Dielectric=X5R, Manufacturer=Murata, Max Operating Temperature=85°C, Min Operating Temperature=-55°C, Ratings=AEC-Q200, Supplier Part Number 1=490-12330-1-ND, Tolerance=10%, Voltage Rating=50V, Case/Package=0603, Category="Ceramic Capacitors", ComponentLink1Description=http://www.farnell.com/datasheets/2165959.pdf?src-supplier=Farnell, ComponentLink1URL=http://www.farnell.com/datasheets/2165959.pdf?src-supplier=Farnell, ComponentLink2Description=http://search.murata.co.jp/Ceramy/image/img/A01X/G101/ENG/GRT188R61H105KE13-01.pdf?src-supplier=Digi-Key, ComponentLink2URL=http://search.murata.co.jp/Ceramy/image/img/A01X/G101/ENG/GRT188R61H105KE13-01.pdf?src-supplier=Digi-Key, ComponentLink3Description=https://search.murata.co.jp/Ceramy/image/img/A01X/G101/ENG/GRT188R61H105KE13-01.pdf?src-supplier=Digi-Key, ComponentLink3URL=https://search.murata.co.jp/Ceramy/image/img/A01X/G101/ENG/GRT188R61H105KE13-01.pdf?src-supplier=Digi-Key, ComponentLink4Description=http://www.farnell.com/datasheets/2165959.pdf?src-supplier=Newark, ComponentLink4URL=http://www.farnell.com/datasheets/2165959.pdf?src-supplier=Newark, Length=0.063inch, Manufacturer Part Number=GRT188R61H105KE13D, Mount="Surface Mount", Packaging="Tape and Reel", Pricing 1="1=0.26000, 10=0.17900, 50=0.10720, 100=0.09060, 500=0.06198, 1000=0.05483 (USD)", RoHS=Yes, RoHS Compliant=Yes, Stock 1=645268, Supplier 1=Digi-Key, Thickness=0.035inch, Voltage Rating (DC)=50V, Width=0.031inch
C18 C27 C30: library part GCM188R72A103KA37D, "Multilayer Ceramic Capacitor, AEC-Q200 GCM Series, 0.01 F, 10%, X7R, 100 V RoHS Compliant: Yes", Capacitance=10nF, Case Code (Imperial)=0603, Case Code (Metric)=1608, Dielectric=X7R, Manufacturer=Murata, Max Operating Temperature=125°C, Min Operating Temperature=-55°C, Package Quantity=1, Ratings=AEC-Q200, Supplier Part Number 1=490-4781-1-ND, Tolerance=10%, Voltage=100V, Case/Package=0603, Category="Ceramic Capacitors", ComponentLink1Description=https://datasheet.ciiva.com/132/product-132907.pdf?src-supplier=Digi-Key, ComponentLink1URL=https://datasheet.ciiva.com/132/product-132907.pdf?src-supplier=Digi-Key, ComponentLink2Description=https://datasheet.ciiva.com/132/product-132909.pdf?src-supplier=Digi-Key, ComponentLink2URL=https://datasheet.ciiva.com/132/product-132909.pdf?src-supplier=Digi-Key, ComponentLink3Description=https://datasheet.ciiva.com/16497/product-16497251.pdf?src-supplier=Future+Electronics, ComponentLink3URL=https://datasheet.ciiva.com/16497/product-16497251.pdf?src-supplier=Future+Electronics, ComponentLink4Description=https://datasheet.ciiva.com/18183/getdatasheetpartid-178890-18183651.pdf?src-supplier=Verical, ComponentLink4URL=https://datasheet.ciiva.com/18183/getdatasheetpartid-178890-18183651.pdf?src-supplier=Verical, ComponentLink5Description=https://datasheet.ciiva.com/132/product-132908.pdf?src-supplier=Digi-Key, ComponentLink5URL=https://datasheet.ciiva.com/132/product-132908.pdf?src-supplier=Digi-Key, ComponentLink6Description=https://datasheet.ciiva.com/11786/0900766b80ef92d0-11786108.pdf?src-supplier=RSComponents, ComponentLink6URL=https://datasheet.ciiva.com/11786/0900766b80ef92d0-11786108.pdf?src-supplier=RSComponents, ComponentLink7Description=https://datasheet.ciiva.com/11619/product-11619719.pdf?src-supplier=Avnet, ComponentLink7URL=https://datasheet.ciiva.com/11619/product-11619719.pdf?src-supplier=Avnet, Construction=Flat, Depth=0.8mm, Height=0.8mm, Lead Free="Lead Free", Length=1.6mm, Manufacturer Part Number=GCM188R72A103KA37D, Mount="Surface Mount", Packaging="Tape and Reel", Pricing 1="1=0.10000, 10=0.07400, 50=0.04060, 100=0.03310, 500=0.02364, 1000=0.01857 (USD)", Radiation Hardening=No, REACH SVHC="No SVHC", RoHS=Yes, RoHS Compliant=Yes, Series=GCM, Stock 1=112779, Supplier 1=Digi-Key, Termination=SMD/SMT, Thickness=0.035inch, Voltage Rating=100V, Voltage Rating (DC)=100V, Width=0.8mm
C29: library part GRM188R61A226ME15D, "Cap Ceramic 0603 22 uF 10 V ±20% Tolerance X5R Multilayer Ceramic Chip Capacitor", Capacitance=22uF, Case Code (Imperial)=0603, Case Code (Metric)=1608, Dielectric=X5R, Manufacturer=Murata, Max Operating Temperature=85°C, Min Operating Temperature=-55°C, Package Quantity=4000, Supplier Part Number 1=490-10476-1-ND, Tolerance=20%, Voltage Rating=10V, Case/Package=0603, Category="Ceramic Capacitors", ComponentLink1Description=https://datasheet.ciiva.com/46444/1769893-46444975.pdf?src-supplier=Element14, ComponentLink1URL=https://datasheet.ciiva.com/46444/1769893-46444975.pdf?src-supplier=Element14, Depth=0.8mm, Height=0.8mm, Lead Free="Lead Free", Length=1.6mm, Manufacturer Part Number=GRM188R61A226ME15D, Material=Ceramic, Mount="Surface Mount", Packaging="Tape and Reel", Pricing 1="1=0.30000, 10=0.20500, 50=0.13680, 100=0.11630, 500=0.08210, 1000=0.07184 (USD)", REACH SVHC="No SVHC", RoHS=Yes, RoHS Compliant=Yes, Stock 1=1378902, Supplier 1=Digi-Key, Termination=SMD/SMT, Thickness=0.039inch, Voltage Rating (DC)=10V, Weight=0.000222oz, Width=0.8mm
C31: library part GRM21BR60J107ME15L, "Multilayer Ceramic Capacitor, 100 µF, 6.3 V, 0805 [2012 Metric], ± 20%, X5R, GRM Series", Capacitance=100uF, Case Code (Imperial)=0805, Case Code (Metric)=2012, Dielectric=X5R, Manufacturer=Murata, Max Operating Temperature=85°C, Min Operating Temperature=-55°C, Supplier Part Number 1=490-13981-1-ND, Tolerance=20%, Voltage Rating=6.3V, Case/Package=0805, Category="Ceramic Capacitors", ComponentLink1Description=http://www.farnell.com/datasheets/1957830.pdf?src-supplier=Farnell, ComponentLink1URL=http://www.farnell.com/datasheets/1957830.pdf?src-supplier=Farnell, ComponentLink2Description=https://search.murata.co.jp/Ceramy/image/img/A01X/G101/ENG/GRM21BR60J107ME15-01.pdf?src-supplier=Digi-Key, ComponentLink2URL=https://search.murata.co.jp/Ceramy/image/img/A01X/G101/ENG/GRM21BR60J107ME15-01.pdf?src-supplier=Digi-Key, ComponentLink3Description=http://www.farnell.com/datasheets/1957830.pdf?src-supplier=Element14, ComponentLink3URL=http://www.farnell.com/datasheets/1957830.pdf?src-supplier=Element14, ComponentLink4Description=http://www.farnell.com/datasheets/1957830.pdf?src-supplier=Newark, ComponentLink4URL=http://www.farnell.com/datasheets/1957830.pdf?src-supplier=Newark, Lead Free="Lead Free", Length=0.079inch, Manufacturer Part Number=GRM21BR60J107ME15L, Mount="Surface Mount", Packaging="Cut Tape", Pricing 1="1=1.47000, 10=1.16400, 50=1.00840, 100=0.87270, 500=0.65934, 1000=0.58177 (USD)", REACH SVHC="No SVHC", RoHS=Yes, RoHS Compliant=Yes, Stock 1=36253, Supplier 1=Digi-Key, Thickness=0.057inch, Voltage Rating (DC)=6.3V, Width=0.049inch
ESD1 ESD2 ESD3: library part SP1003-01ETG, "ESD Suppressor Diode TVS Uni-Dir 5V Automotive 2-Pin SOD-882 T/R", Breakdown Voltage=5V, Capacitance=30pF, Clamping Voltage=12V, Leakage Current=100nA, Manufacturer=Littelfuse, Max Operating Temperature=85°C, Max Surge Current=7A, Min Breakdown Voltage=6V, Min Operating Temperature=-40°C, Package Quantity=3000, Power Line Protection=No, Resistor Type=Zener, Supplier Part Number 1=F4088CT-ND, Test Current=1mA, Category="TVS Diodes", ComponentLink1Description=https://datasheet.ciiva.com/4507/littelfuse-tvs-diode-array-spa-sp1003-221268-4507734.pdf?src-supplier=Mouser, ComponentLink1URL=https://datasheet.ciiva.com/4507/littelfuse-tvs-diode-array-spa-sp1003-221268-4507734.pdf?src-supplier=Mouser, ComponentLink2Description=https://datasheet.ciiva.com/16488/littelfuse-tvs-diode-array-spa-sp1003-16488471.pdf?src-supplier=Future+Electronics, ComponentLink2URL=https://datasheet.ciiva.com/16488/littelfuse-tvs-diode-array-spa-sp1003-16488471.pdf?src-supplier=Future+Electronics, ComponentLink3Description=https://datasheet.ciiva.com/330/littelfuse-tvs-diode-array-sp1003-datasheet-pdf-330594.pdf?src-supplier=Digi-Key, ComponentLink3URL=https://datasheet.ciiva.com/330/littelfuse-tvs-diode-array-sp1003-datasheet-pdf-330594.pdf?src-supplier=Digi-Key, ComponentLink4Description=https://datasheet.ciiva.com/330/littelfuse-tvs-diode-array-sp1003-datasheet-pdf-330595.pdf?src-supplier=Digi-Key, ComponentLink4URL=https://datasheet.ciiva.com/330/littelfuse-tvs-diode-array-sp1003-datasheet-pdf-330595.pdf?src-supplier=Digi-Key, ComponentLink5Description=https://datasheet.ciiva.com/330/littelfuse-tvs-diode-array-sp1003-datasheet-pdf-330596.pdf?src-supplier=Digi-Key, ComponentLink5URL=https://datasheet.ciiva.com/330/littelfuse-tvs-diode-array-sp1003-datasheet-pdf-330596.pdf?src-supplier=Digi-Key, ComponentLink6Description=https://datasheet.ciiva.com/1268/1854133-1268499.pdf?src-supplier=Element14, ComponentLink6URL=https://datasheet.ciiva.com/1268/1854133-1268499.pdf?src-supplier=Element14, Diode Type=ZENER, Lead Free="Lead Free", Manufacturer Part Number=SP1003-01ETG, Mount="Surface Mount", Number of Channels=1, Number of Elements=1, Number of Pins=2, Number of Unidirectional Channels=1, Operating Supply Voltage=5V, Packaging="Tape and Reel", Peak Pulse Current=7A, Polarity=Bidirectional,Unidirectional, Pricing 1="1=0.45000, 10=0.35100, 100=0.21040, 500=0.19478, 1000=0.13245, 2000=0.12193, 5000=0.11686 (USD)", REACH SVHC="No SVHC", Reverse Breakdown Voltage=6V, Reverse Standoff Voltage=5V, RoHS=Yes, RoHS Compliant=Yes, Series="Automotive, AEC-Q101, SP1003, SPA®", Stock 1=9965, Supplier 1=Digi-Key, Termination=SMD/SMT
FB1 FB2 FB6: library part BLM18AG601SN1D, "Ferrite Bead, 0603 / 1608, 600 ohm, 500 mA, Série BLM18A, 0.38 ohm, ± 25%", Case Code (Imperial)=0603, Case Code (Metric)=1608, Current Rating=500mA, DC Resistance (DCR)=380mR, Frequency=100MHz, Manufacturer=Murata, Max Operating Temperature=125°C, Min Operating Temperature=-55°C, Package Quantity=1, Supplier Part Number 1=490-1014-1-ND, Tolerance=25%, Case/Package=0603, Category=Inductors, ComponentLink1Description=https://datasheet.ciiva.com/19460/1844766-19460213.pdf?src-supplier=Jameco, ComponentLink1URL=https://datasheet.ciiva.com/19460/1844766-19460213.pdf?src-supplier=Jameco, ComponentLink2Description=https://datasheet.ciiva.com/29347/442309-da-01-en-chip-drossel-0603-600r-500ma-1-6x0-8mm-29347900.pdf?src-supplier=Conrad, ComponentLink2URL=https://datasheet.ciiva.com/29347/442309-da-01-en-chip-drossel-0603-600r-500ma-1-6x0-8mm-29347900.pdf?src-supplier=Conrad, ComponentLink3Description=https://datasheet.ciiva.com/41449/001172228-da-01-en-drossel-0603-600r-1-6x0-8mm-4000st-41449517.pdf?src-supplier=Conrad, ComponentLink3URL=https://datasheet.ciiva.com/41449/001172228-da-01-en-drossel-0603-600r-1-6x0-8mm-4000st-41449517.pdf?src-supplier=Conrad, ComponentLink4Description=https://datasheet.ciiva.com/1012/l0110s0100blm18a-1012017.pdf?src-supplier=Digi-Key, ComponentLink4URL=https://datasheet.ciiva.com/1012/l0110s0100blm18a-1012017.pdf?src-supplier=Digi-Key, ComponentLink5Description=https://datasheet.ciiva.com/1012/l0110s0100blm18a-1012018.pdf?src-supplier=Digi-Key, ComponentLink5URL=https://datasheet.ciiva.com/1012/l0110s0100blm18a-1012018.pdf?src-supplier=Digi-Key, ComponentLink6Description=https://datasheet.ciiva.com/1012/l0110s0100blm18a-1012019.pdf?src-supplier=Digi-Key, ComponentLink6URL=https://datasheet.ciiva.com/1012/l0110s0100blm18a-1012019.pdf?src-supplier=Digi-Key, ComponentLink7Description=https://datasheet.ciiva.com/1466/1756147-1466933.pdf?src-supplier=Element14, ComponentLink7URL=https://datasheet.ciiva.com/1466/1756147-1466933.pdf?src-supplier=Element14, ComponentLink8Description=https://datasheet.ciiva.com/1466/1756147-1466934.pdf?src-supplier=Element14, ComponentLink8URL=https://datasheet.ciiva.com/1466/1756147-1466934.pdf?src-supplier=Element14, ComponentLink9Description=https://datasheet.ciiva.com/16210/l0110s0100blm18a-16210006.pdf?src-supplier=Future+Electronics, ComponentLink9URL=https://datasheet.ciiva.com/16210/l0110s0100blm18a-16210006.pdf?src-supplier=Future+Electronics, ComponentLink10Description=https://datasheet.ciiva.com/3081/l0110s0100blm18a-3081613.pdf?src-supplier=Avnet, ComponentLink10URL=https://datasheet.ciiva.com/3081/l0110s0100blm18a-3081613.pdf?src-supplier=Avnet, Core Material=Ferrite, DC Current=500mA, Depth=0.8mm, Height=0.8mm, Impedance=600R, Lead Free="Lead Free", Length=1.6mm, Manufacturer Part Number=BLM18AG601SN1D, Material=Steel,Ferrite, Max Current Rating=500mA, Max DC Current=500mA, Military Standard=Not, Number of Circuits=1, Number of Lines=1, Number of Pins=2, Packaging="Tape and Reel", Pricing 1="1=0.10000, 10=0.07200, 25=0.06560, 50=0.05900, 100=0.04320, 250=0.03144, 500=0.02882, 1000=0.02489 (USD)", Radiation Hardening=No, REACH SVHC="No SVHC", RoHS=Yes, RoHS Compliant=Yes, Shielding=Unshielded, Stock 1=826617, Supplier 1=Digi-Key, Termination=SMD/SMT, Test Frequency=100MHz, Weight=7.1E-05oz, Width=0.8mm
FB3: library part 74279266, "Ferrite Bead, 0603 [1608 Metric], 1 kohm, 200 mA, WE-CBF Series, 0.6 ohm, ± 25%", Case Code (Imperial)=0603, Case Code (Metric)=1608, Case/Package=SMD/SMT, Current Rating=200mA, DC Resistance (DCR)=600mR, Inductance=1.8nH, Manufacturer="Wurth Electronics", Max Operating Temperature=125°C, Min Operating Temperature=-55°C, Supplier Part Number 1=732-4484-1-ND, Test Frequency=100MHz, Tolerance=25%, Category="Ferrite Beads and Chips", ComponentLink1Description=https://datasheet.ciiva.com/14634/0900766b801ef1d0-14634816.pdf?src-supplier=Allied+Electronics, ComponentLink1URL=https://datasheet.ciiva.com/14634/0900766b801ef1d0-14634816.pdf?src-supplier=Allied+Electronics, ComponentLink2Description=https://datasheet.ciiva.com/23763/74279266-23763009.pdf?src-supplier=Newark, ComponentLink2URL=https://datasheet.ciiva.com/23763/74279266-23763009.pdf?src-supplier=Newark, ComponentLink3Description=https://datasheet.ciiva.com/11799/0900766b801ef1d0-11799352.pdf?src-supplier=RSComponents, ComponentLink3URL=https://datasheet.ciiva.com/11799/0900766b801ef1d0-11799352.pdf?src-supplier=RSComponents, ComponentLink4Description=https://datasheet.ciiva.com/14971/74279266-14971192.pdf?src-supplier=Digi-Key, ComponentLink4URL=https://datasheet.ciiva.com/14971/74279266-14971192.pdf?src-supplier=Digi-Key, ComponentLink5Description=https://datasheet.ciiva.com/12395/74279266-221135-12395453.pdf?src-supplier=Mouser, ComponentLink5URL=https://datasheet.ciiva.com/12395/74279266-221135-12395453.pdf?src-supplier=Mouser, ComponentLink6Description=https://datasheet.ciiva.com/1466/1705901-1466509.pdf?src-supplier=Element14, ComponentLink6URL=https://datasheet.ciiva.com/1466/1705901-1466509.pdf?src-supplier=Element14, ComponentLink7Description=https://datasheet.ciiva.com/22711/1705901-22711422.pdf?src-supplier=Element14, ComponentLink7URL=https://datasheet.ciiva.com/22711/1705901-22711422.pdf?src-supplier=Element14, ComponentLink8Description=https://datasheet.ciiva.com/48698/001087059-da-01-ml-we-cbf-smd-ferrit-74279266-de-en-48698427.pdf?src-supplier=Conrad, ComponentLink8URL=https://datasheet.ciiva.com/48698/001087059-da-01-ml-we-cbf-smd-ferrit-74279266-de-en-48698427.pdf?src-supplier=Conrad, Core Material=Ferrite, Depth=0.8mm, Height=0.8mm, Impedance=1kR, Lead Free="Lead Free", Length=1.6mm, Manufacturer Part Number=74279266, Max Current Rating=200mA, Max DC Current=200mA, Number of Lines=1, Packaging="Tape and Reel", Pricing 1="1=0.17000, 50=0.16800, 100=0.15500, 500=0.14800, 1000=0.14100, 2000=0.13400 (USD)", REACH SVHC=Unknown, RoHS=Yes, RoHS Compliant=Yes, Series=WE-CBF, Shielding=Unshielded, Stock 1=55585, Supplier 1=Digi-Key, Termination=SMD/SMT, Width=0.8mm
H1: library part 282834-2, "TE CONNECTIVITY / BUCHANAN - 282834-2 - TERMINAL BLOCK, WIRE TO BRD, 2POS, 16AWG", Color=Green, Current=10A, Flammability Rating="UL94 V-0", Manufacturer="TE Connectivity", Max Operating Temperature=105°C, Max Supply Voltage (AC)=150V, Min Operating Temperature=-40°C, Package Quantity=300, Supplier Part Number 1=A98333-ND, Approvals=UL, Category="Terminal Blocks", Closed End="No (Without)", ComponentLink1Description=https://datasheet.ciiva.com/11758/0900766b80e7dc96-11758675.pdf?src-supplier=RSComponents, ComponentLink1URL=https://datasheet.ciiva.com/11758/0900766b80e7dc96-11758675.pdf?src-supplier=RSComponents, ComponentLink2Description=https://datasheet.ciiva.com/16386/282834-2-16386363.pdf?src-supplier=Future+Electronics, ComponentLink2URL=https://datasheet.ciiva.com/16386/282834-2-16386363.pdf?src-supplier=Future+Electronics, ComponentLink3Description=https://datasheet.ciiva.com/14609/70086732-14609670.pdf?src-supplier=Allied+Electronics, ComponentLink3URL=https://datasheet.ciiva.com/14609/70086732-14609670.pdf?src-supplier=Allied+Electronics, ComponentLink4Description=https://datasheet.ciiva.com/15169/getdatasheetpartid-155864-15169558.pdf?src-supplier=Verical, ComponentLink4URL=https://datasheet.ciiva.com/15169/getdatasheetpartid-155864-15169558.pdf?src-supplier=Verical, ComponentLink5Description=https://datasheet.ciiva.com/16676/eng-cs-1308389-eurostyle-terminal-blocks-0607-16676126.pdf?src-supplier=Avnet+Europe, ComponentLink5URL=https://datasheet.ciiva.com/16676/eng-cs-1308389-eurostyle-terminal-blocks-0607-16676126.pdf?src-supplier=Avnet+Europe, ComponentLink6Description=https://datasheet.ciiva.com/30166/eng-cs-1308389-eurostyle-terminal-blocks-0607-30166974.pdf?src-supplier=Onlinecomponents.com, ComponentLink6URL=https://datasheet.ciiva.com/30166/eng-cs-1308389-eurostyle-terminal-blocks-0607-30166974.pdf?src-supplier=Onlinecomponents.com, ComponentLink7Description=https://datasheet.ciiva.com/3141/eng-cs-1308389-eurostyle-terminal-blocks-0607-3141115.pdf?src-supplier=Avnet, ComponentLink7URL=https://datasheet.ciiva.com/3141/eng-cs-1308389-eurostyle-terminal-blocks-0607-3141115.pdf?src-supplier=Avnet, ComponentLink8Description=https://datasheet.ciiva.com/823/eng-cd-282834-c1-823453.pdf?src-supplier=Digi-Key, ComponentLink8URL=https://datasheet.ciiva.com/823/eng-cd-282834-c1-823453.pdf?src-supplier=Digi-Key, Connector Type=Receptacle, Contact Material=Brass, Contact Plating=Tin, Current Rating=10A, Depth=6.5mm, ELV=Compliant, Gender=Male, Housing Color=Green, Housing Material=Polyamide, Interlock="No (Without)", Lead Free="Lead Free", Length=5.54mm, Manufacturer Part Number=282834-2, Material=Nylon, Max Current Rating=10A, Max Voltage Rating (AC)=150V, Mount="Through Hole", Number of Circuits=2, Number of Contacts=2, Number of Levels=1, Number of Poles=2, Number of Positions=2, Number of Positions Per Level=2, Number of Rows=1, Orientation=Straight, Packaging=Bulk, Pitch=2.54mm, Plating=Brass,Steel, Pricing 1="1=1.27000, 10=0.89500, 25=0.83440, 50=0.75740, 100=0.75410, 250=0.63676, 500=0.60324, 1000=0.53622, 5000=0.50270 (USD)", Radiation Hardening=No, REACH SVHC=Unknown, RoHS=Yes, RoHS Compliant=Yes, Screw Flange="No (Without)", Screwless Terminal Block="Yes (With)", Series=Buchanan, Side Stackable="Yes (With)", Stock 1=20643, Supplier 1=Digi-Key, Tail Length=3.4mm, Termination=Solder, Thread Size=M1.6, Voltage=150V, Voltage Rating=150V, Width=6.5mm, Wire Gauge (Max)=30AWG, Wire Gauge (Min)=30AWG, Wire/Cable Gauge=30AWG